# EAGLE board Genius Arduino (EAGLE 9.7.0)

Size 222.28 x 93.96 mm. Coordinates in mm from the lower left corner, seen from the top.
Outline: 0,0 222.28,0 222.28,93.96 0,93.96 0,0
Copper layers (1*16): Top 0.035mm / dielectric 1.5mm / Bottom 0.035mm
Design rules "default": minimum track width 6mil, minimum drill 0.35mm, track to track 6mil, track to pad 6mil, pad to pad 6mil, via to via 6mil, smd to smd 6mil, copper to edge 40mil, drill to drill 6mil, minimum pad ring 10mil, minimum via ring 8mil, stop-mask expansion 4mil, vias tented up to drill 0mil, thermal gap 10mil

## Footprints (pad centres in the part's own frame; a part is rotated, then mirrored left to right if it is on the bottom)
LEDRD254W60D565H860B_B = drill 0.981 pad 1.581: 1 -1.27,0; 2 1.27,0
LEDRD254W60D565H860B_G = drill 0.981 pad 1.581: 1 -1.27,0; 2 1.27,0
LEDRD254W60D565H860B = drill 0.981 pad 1.581: 1 -1.27,0; 2 1.27,0
LEDRD254W60D565H860B_Y = drill 0.981 pad 1.581: 1 -1.27,0; 2 1.27,0
PIEZO = drill 1 pad 1.6: 1 -3.5,0; 2 3.5,0
RESAD1016W63L850D250B = drill 0.83 pad 1.43: 1 -5.08,0; 2 5.08,0
SWITCH-MOMENTARY-PTH-6.5MM = drill 1.016 pad 1.88: 1 -3.251,2.261; 2 3.251,2.261; 3 -3.251,-2.261; 4 3.251,-2.261
ARDUINO-UNO-R3-SHIELD = drill 1.016 pad 1.88: 3.3V 24.13,-2.54; 5V 24.13,0; A0 24.13,12.7; A1 24.13,15.24; A2 24.13,17.78; A3 24.13,20.32; A4 24.13,22.86; A5 24.13,25.4; AREF -24.13,-13.97; D2 -24.13,20.32; D3 -24.13,17.78; D4 -24.13,15.24; D5 -24.13,12.7; D6 -24.13,10.16; D7 -24.13,7.62; D8 -24.13,3.81; D9 -24.13,1.27; D10 -24.13,-1.27; D11 -24.13,-3.81; D12 -24.13,-6.35; D13 -24.13,-8.89; GND@0 24.13,2.54; GND@1 24.13,5.08; GND@2 -24.13,-11.43; IOREF 24.13,-7.62; NC 24.13,-10.16; RES 24.13,-5.08; RX -24.13,25.4; SCL -24.13,-19.05; SDA -24.13,-16.51; TX -24.13,22.86; VIN 24.13,7.62

## Placement (x,y rotation side)
DLEDBLUE  BLUE  [LEDRD254W60D565H860B_B]  206.96,60.25 180 top
DLEDGREEN  GREEN  [LEDRD254W60D565H860B_G]  168.86,67.87 180 top
DLEDRED  RED  [LEDRD254W60D565H860B]  206.96,67.87 180 top
DLEDYELLOW  YELLOW  [LEDRD254W60D565H860B_Y]  168.86,60.25 180 top
PIEZO1  PIEZO  [PIEZO]  19.05,13.58 0 top
R2  330  [RESAD1016W63L850D250B]  175.21,75.49 180 top
R3  330  [RESAD1016W63L850D250B]  175.21,55.17 0 top
R4  330  [RESAD1016W63L850D250B]  213.31,75.49 0 top
R5  330  [RESAD1016W63L850D250B]  213.31,55.17 0 top
SBUTBLUE  SWITCH_MOMENTARY  [SWITCH-MOMENTARY-PTH-6.5MM]  190.45,56.44 90 top
SBUTGREEN  SWITCH_MOMENTARY  [SWITCH-MOMENTARY-PTH-6.5MM]  157.43,71.68 90 top
SBUTRED  SWITCH_MOMENTARY  [SWITCH-MOMENTARY-PTH-6.5MM]  190.45,71.68 90 top
SBUTYELLOW  SWITCH_MOMENTARY  [SWITCH-MOMENTARY-PTH-6.5MM]  157.43,56.44 90 top
U1  ARDUINO-UNO-R3-SHIELD  [ARDUINO-UNO-R3-SHIELD]  47.88,64.12 270 top

## Library data of the parts
DLEDBLUE = Tinkercad; CATEGORY: Opto-Electronic; SUB-CATEGORY: LED; VALUE: LED_BLUE
DLEDGREEN = Tinkercad; CATEGORY: Opto-Electronic; SUB-CATEGORY: LED; VALUE: LED_GREEN
DLEDRED = Tinkercad; CATEGORY: Opto-Electronic; SUB-CATEGORY: LED; VALUE: LED_RED
DLEDYELLOW = Tinkercad; CATEGORY: Opto-Electronic; SUB-CATEGORY: LED; VALUE: LED_YELLOW
PIEZO1 R2-R5 SBUTBLUE SBUTGREEN SBUTRED SBUTYELLOW U1 = Tinkercad

## Nets
DLEDBLUE_A: DLEDBLUE.1 R5.1
DLEDGREEN_A: DLEDGREEN.1 R2.2
DLEDRED_A: DLEDRED.1 R4.1
DLEDYELLOW_A: DLEDYELLOW.1 R3.1
U1_D2: SBUTGREEN.3 SBUTGREEN.4 U1.D2
U1_D3: R2.1 U1.D3
U1_D4: SBUTRED.3 SBUTRED.4 U1.D4
U1_D5: R4.2 U1.D5
U1_D6: R5.2 U1.D6
U1_D7: SBUTBLUE.3 SBUTBLUE.4 U1.D7
U1_D8: R3.2 U1.D8
U1_D9: SBUTYELLOW.3 SBUTYELLOW.4 U1.D9
U1_D10: PIEZO1.1 U1.D10
U1_GND: DLEDBLUE.2 DLEDGREEN.2 DLEDRED.2 DLEDYELLOW.2 PIEZO1.2 SBUTBLUE.1 SBUTBLUE.2 SBUTGREEN.1 SBUTGREEN.2 SBUTRED.1 SBUTRED.2 SBUTYELLOW.1 SBUTYELLOW.2 U1.GND@0 U1.GND@1 U1.GND@2

## Tracks (layer width: path | path; a pad name or v marks a point on that pad's centre or on a via)
DLEDBLUE_A  (1 unrouted)
DLEDGREEN_A  (1 unrouted)
DLEDRED_A  (1 unrouted)
DLEDYELLOW_A  (1 unrouted)
U1_D2  (2 unrouted)
U1_D3  (1 unrouted)
U1_D4  (2 unrouted)
U1_D5  (1 unrouted)
U1_D6  (1 unrouted)
U1_D7  (2 unrouted)
U1_D8  (1 unrouted)
U1_D9  (2 unrouted)
U1_D10  (1 unrouted)
U1_GND  (15 unrouted)